# Altium PCB S7CAS-PLEIADES-CARTE-MERE_P01.PcbDoc (part 7 of 9)
Units mil, origin at the board's own origin, x right, y up, seen from the top; angles counter-clockwise.
Board outline 6153 x 3696 mil, 16 copper layers (Top, Ground Plane 1, Signal Layer 1, Ground Plane 2, Signal Layer 2, Ground Plane 3, Power Plane, Ground Plane 4, Ground Plane 5, Power Plane 2, Ground Plane 6, Signal Layer 3, Ground Plane 7, Signal Layer 4, Ground Plane 8, Bottom), stack 75.282 mil thick; 430 components, 328 nets, 2174 pads, 2158 vias.
Unrouted connection lines stored in the file: 202.
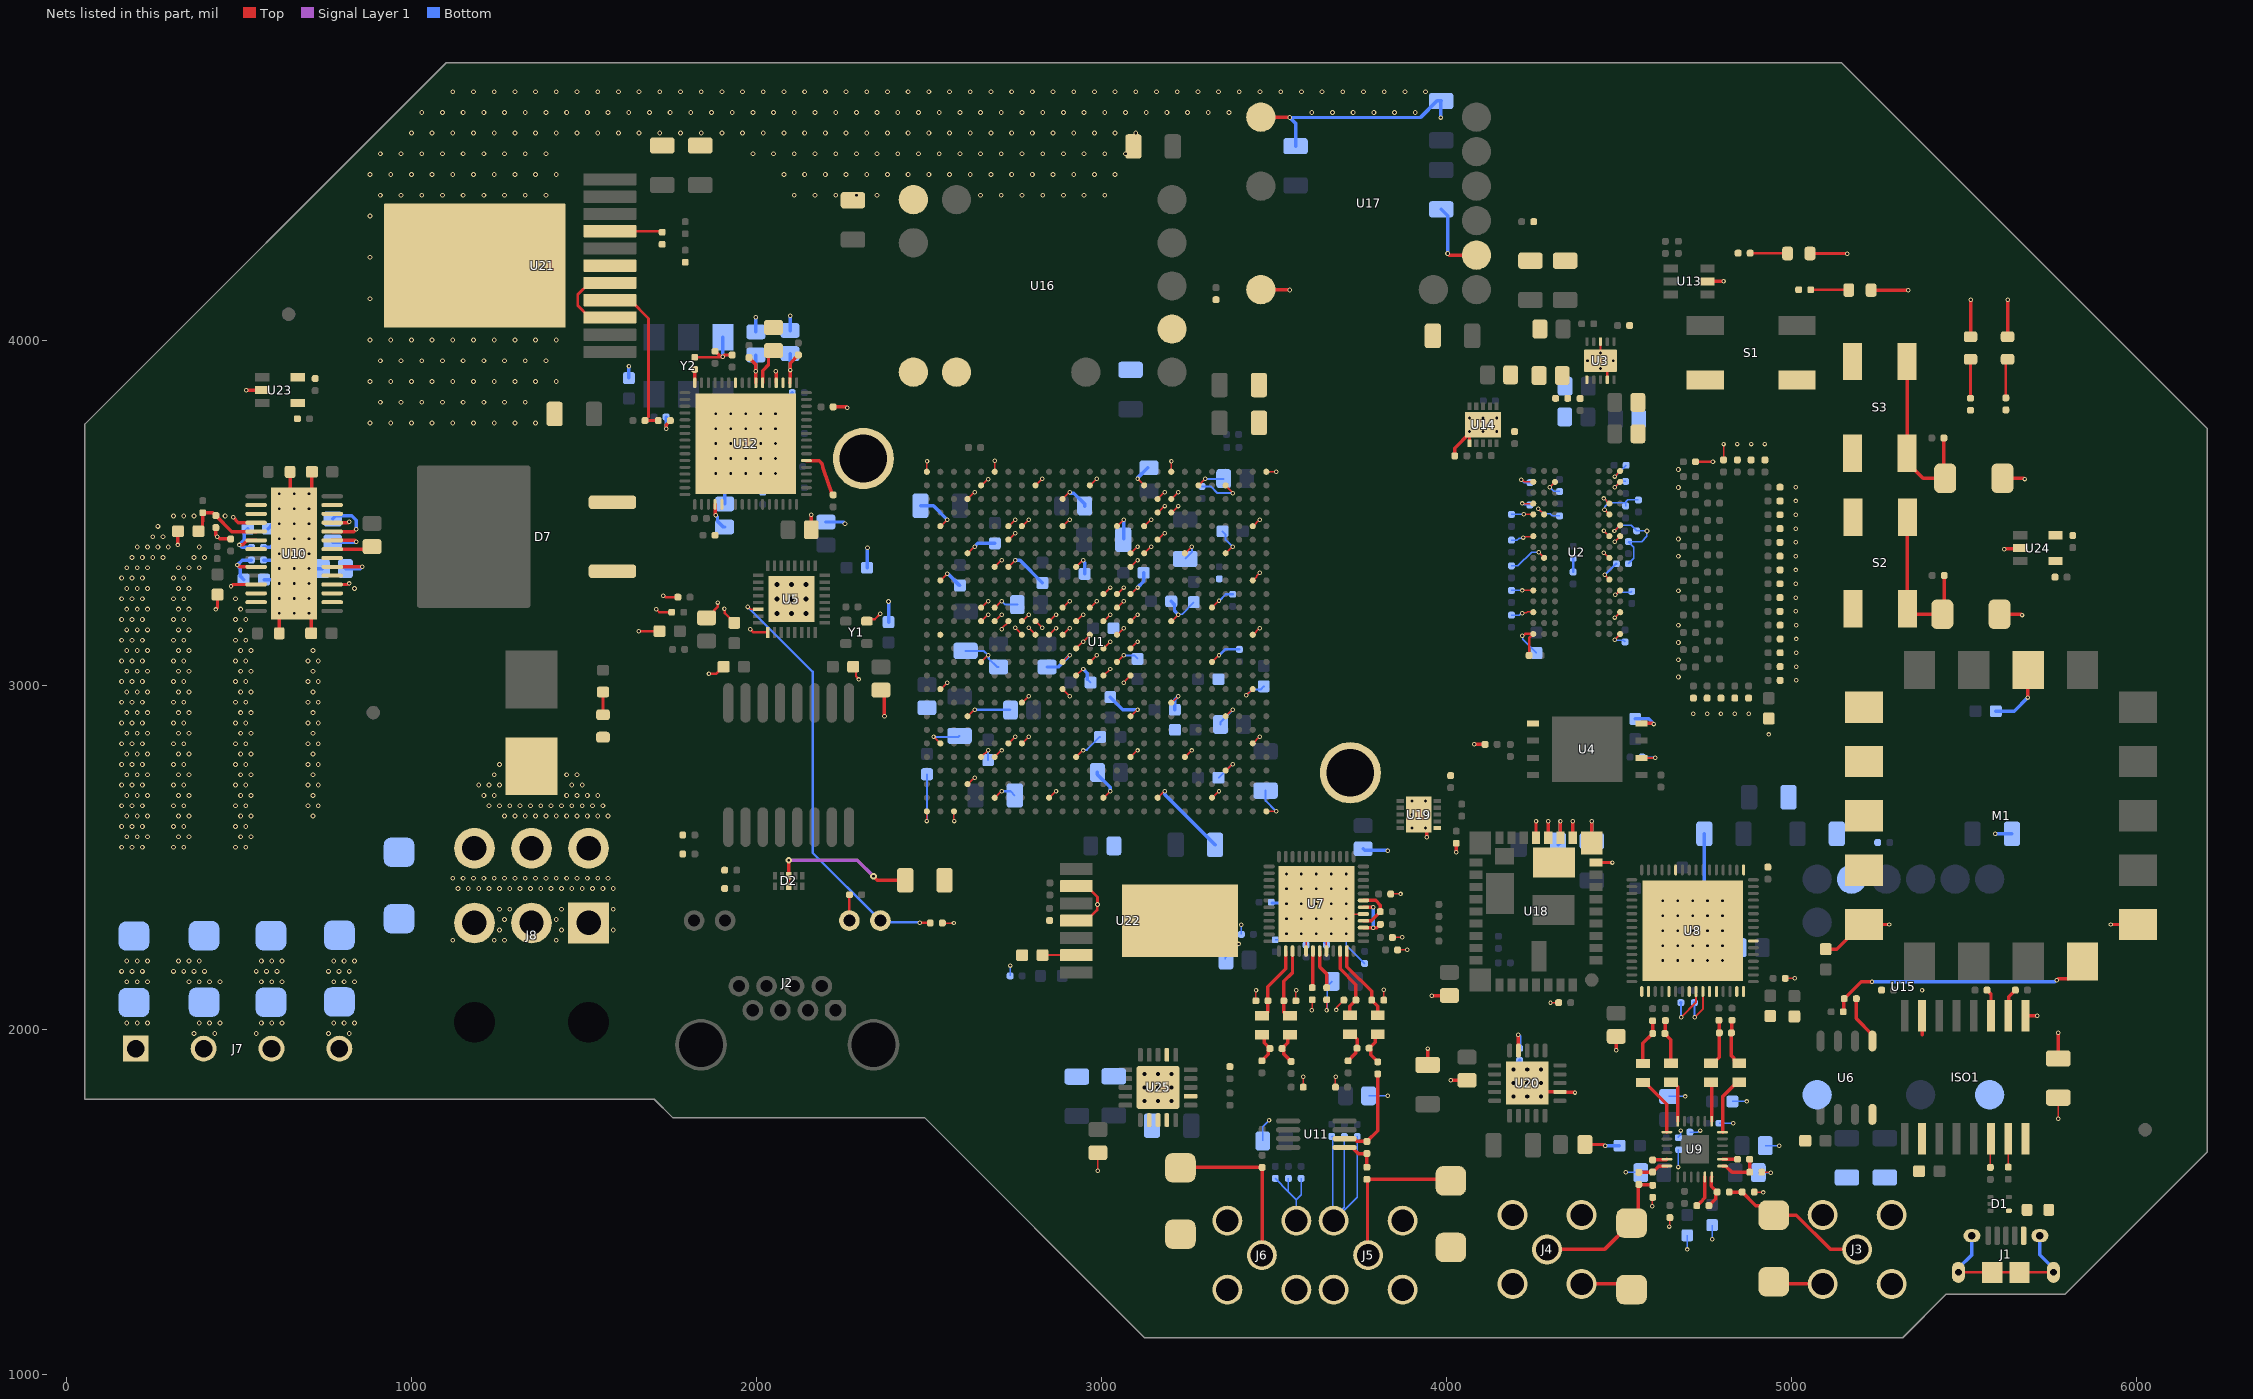
[diagram p19: the nets of this part, all layers, seen from the top]

## Via types
v1: diameter 14, hole 8, Top to Bottom, 1322 vias
v2: diameter 13, hole 7, Top to Bottom, 662 vias
v3: diameter 19.68, hole 7.87, Top to Bottom, 137 vias
v4: diameter 19.68, hole 11.81, Top to Bottom, 15 vias
v5: diameter 15.75, hole 7.87, Top to Bottom, 12 vias
v6: diameter 22, hole 12, Top to Bottom, 9 vias
v7: diameter 20, hole 12, Top to Bottom, 1 vias

## Nets (pads, with @x,y where several pads share a name; then routed paths per layer and width w, separated by ;. In a path a pad name is that pad's centre, name@x,y a point inside that pad or via, vN(x,y) a via of type N, cw(c..) or ccw(c..) an arc to the next point about the centre after c; other vN are vias at no path point) (continued)
GND: C1.1 C2.1 C3.1 C4.1 C5.1 C6.1 C7.1 C8.1 C9.1 C10.2 C11.1 C12.1 C13.1 C14.1 C16.1 C17.1 C18.1 C19.1 C20.1 C21.1 C22.1 C23.1 C24.1 C25.1 C26.1 C27.1 C28.1 C29.1 C30.1 C31.1 C32.1 C33.1 C34.1 C35.1 C36.1 C37.1 C38.1 C39.1 C40.1 C41.1 C42.1 C43.1 C44.1 C45.1 C46.1 C47.1 C49.1 C50.1 C55.1 C56.1 C57.1 C58.1 C59.1 C60.1 C61.1 C62.1 C63.1 C64.1 C65.1 C66.1 C67.1 C68.1 C69.1 C70.1 C71.1 C72.1 C73.1 C74.1 C75.1 C76.1 C78.1 C79.1 C80.1 C81.1 C82.1 C83.1 C84.1 C85.1 C86.1 C87.1 C88.1 C89.1 C90.1 C91.1 C92.1 C93.1 C96.1 C97.1 C98.1 C101.1 C102.1 C103.1 C104.1 C105.1 C106.1 C107.1 C108.1 C109.1 C110.1 C111.1 C112.1 C113.1 C114.1 C115.1 C116.1 C117.1 C118.1 C121.1 C122.1 C123.1 C124.1 C125.1 C126.1 C127.1 C128.1 C129.1 C130.1 C131.1 C132.1 C133.1 C134.1 C135.1 C136.1 C137.1 C138.1 C139.1 C140.1 C141.1 C142.1 C143.1 C144.1 C145.1 C146.1 C147.1 C148.1 C149.1 C150.1 C151.1 C152.1 C153.1 C154.1 C155.1 C158.1 C159.1 C160.1 C161.1 C162.1 C163.1 C164.1 C165.1 C166.1 C167.1 C168.1 C169.1 C170.1 C171.1 C172.1 C173.1 C174.1 C175.1 C176.1 C177.1 C178.1 C179.1 C180.1 C181.1 C182.1 C183.1 C188.1 C189.1 C190.1 C191.1 C192.1 C193.1 C194.1 C195.1 C196.1 C197.1 C198.1 C199.1 C200.1 C201.1 C202.1 C203.1 C204.1 C205.1 C206.1 C207.1 C208.1 C209.1 C210.1 C211.1 C212.1 C213.1 C214.1 C215.1 C216.1 C217.1 C218.1 C219.1 C220.1 C221.1 C222.1 C223.1 C224.1 C225.1 D3.K D4.K D5.K D6.K D7.1 D7.3 D8.A D9.A D10.K D11.2 D12.2 D13.2 D14.2 D15.2 D16.2 D17.2 D18.2 D19.2 ISO1.9 ISO1.15 J3.2 J3.3 J3.4 J3.5 J4.2 J4.3 J4.4 J4.5 J5.2 J5.3 J5.4 J5.5 J6.2 J6.3 J6.4 J6.5 J8.4 J8.5 J8.6 M1.1 M1.7 M1.14 R25.1 R28.2 R29.2 R32.2 R35.1 R41.1 R48.1 R56.1 R57.1 R63.1 R65.2 R66.1 R73.1 R77.1 R78.1 R79.1 R84.1 R85.1 R86.1 R89.1 R93.1 R94.1 R96.1 R97.1 R98.1 R99.1 R109.1 R110.1 R111.1 R113.1 R115.1 R116.1 R118.1 R119.1 R122.1 R123.1 R126.1 R128.1 R134.1 R136.1 S1.1 S1.2 S2.3 S2.4 S3.3 S3.4 U1.A1 U1.A26 U1.AA20 U1.AB2 U1.AB12 U1.AB16 U1.AB19 U1.AB20 U1.AB25 U1.AC8 U1.AD16 U1.AD23 U1.AE6 U1.AE10 U1.AE14 U1.AE18 U1.AE22 U1.AF1 U1.AF26 U1.B5 U1.B9 U1.B13 U1.B17 U1.B21 U1.D4 U1.E7 U1.E11 U1.E15 U1.E22 U1.F2 U1.F19 U1.F25 U1.H4 U1.H11 U1.H23 U1.J8 U1.J19 U1.K2 U1.K16 U1.K25 U1.L11 U1.L13 U1.L15 U1.M5 U1.M12 U1.M14 U1.M16 U1.M22 U1.N11 U1.N13 U1.N15 U1.P2 U1.P12 U1.P14 U1.P16 U1.P19 U1.P25 U1.R8 U1.R11 U1.R13 U1.R15 U1.T5 U1.T12 U1.T14 U1.T16 U1.T21 U1.U11 U1.V2 U1.V25 U1.W15 U1.W20 U1.W21 U1.Y4 U1.Y7 U1.Y11 U1.Y23 U2.A9 U2.B1 U2.B3 U2.B9 U2.D1 U2.D8 U2.E1 U2.E2 U2.E8 U2.F9 U2.G1 U2.G8 U2.G9 U2.J2 U2.J8 U2.M1 U2.M9 U2.P1 U2.P9 U2.T1 U2.T9 U3.4 U3.8 U3.11 U4.4 U5.1 U5.33 U5.34 U5.35 U5.36 U5.37 U5.38 U5.39 U5.40 U5.41 U5.42 U6.5 U7.5 U7.41 U7.44 U7.PAD U8.17 U8.18 U8.21 U8.24 U8.27 U8.28 U8.31 U8.32 U8.39 U8.49 U8.59 U8.PAD U10.7 U10.21 U10.PAD U12.36 U12.PAD U13.2 U14.6 U14.11 U15.1 U15.3 U15.6 U16.1 U16.3 U16.4 U16.7 U17.1 U17.3 U17.6 U18.10 U18.11 U18.12 U18.13 U18.14 U18.15 U18.39 U19.6 U19.11 U20.7 U20.21 U21.3 U21.5 U21.6 U21.12 U22.2 U22.4 U22.8 U23.2 U24.2 U25.2 U25.7 U25.17 U25.18 U25.19 U25.E1 U26.1 Y1.2 Y2.3 | length 16474.1
  Top w4: v2@2494.09,2606.13 U1.A26@2494.09,2633.97 ; U1.AF26@2494.09,3618.22 2494.39,3618.52 2494.39,3648.56 v2(2494.69,3648.85) ; v2(2513.52,2849.64) 2514.08,2849.64 2532.9,2830.82 U1.F25@2533.46,2830.82 U1.F25@2534.19,2830.82 ; U1.K25@2534.19,2988.3 v2@2553.01,3007.12 ; U1.V25@2534.19,3303.26 v2@2553.01,3322.08 ; U1.AB25@2534.19,3460.74 v2@2553.01,3479.56 ; R48.1@2539.07,2310.18 v2(2572.83,2310.18) ; U1.H23@2612.93,2909.56 v2@2631.75,2928.38 ; U1.Y23@2612.93,3382 v2@2631.75,3400.82 ; U1.AD23@2612.93,3539.48 v2@2631.75,3558.3 ; U1.E22@2652.3,2791.44 2652.3,2792.06 2671.73,2811.49 v2(2671.85,2811.49) ; U1.M22@2652.3,3067.04 v2@2671.12,3085.86 ; U1.AE22@2652.3,3578.85 2652.99,3578.85 2670.44,3596.3 v2(2671.85,3596.3) ; U1.B21@2691.67,2673.34 v2@2710.49,2692.16 ; U1.T21@2691.67,3224.52 v2@2710.49,3243.34 ; U1.W21@2691.67,3342.63 v2@2710.49,3361.45 ; U1.W20@2731.04,3342.63 v2@2749.86,3361.45 ; U1.AA20@2731.04,3421.37 v2@2749.86,3440.19 ; U1.AB20@2731.04,3460.74 v2@2749.86,3479.56 ; v2(2750.59,3166.3) 2750.59,3165.59 U1.P19@2770.4,3145.78 ; U1.F19@2770.41,2830.82 v2@2789.23,2849.64 ; U1.J19@2770.41,2948.93 v2@2789.23,2967.75 ; U1.AB19@2770.41,3460.74 v2@2789.23,3479.56 ; U1.AE18@2809.78,3578.85 v2@2828.6,3597.67 ; U1.B17@2849.15,2673.34 v2@2867.97,2692.16 ; U1.K16@2888.52,2988.3 2888.52,2987.43 2908.07,2967.89 v2(2908.07,2967.75) ; U1.M16@2888.52,3067.04 v2@2907.34,3085.86 ; U1.P16@2888.52,3145.78 v2@2907.34,3164.6 ; U1.T16@2888.52,3224.52 v2@2907.34,3243.34 ; U1.AB16@2888.52,3460.74 v2@2907.34,3479.56 ; U1.AD16@2888.52,3539.48 v2@2907.34,3558.3 ; U1.E15@2927.89,2791.45 v2@2946.71,2810.27 ; U1.L15@2927.89,3027.67 v2@2946.71,3046.49 ; U1.N15@2927.89,3106.41 v2@2946.71,3125.23 ; U1.R15@2927.89,3185.15 v2@2946.71,3203.97 ; U1.W15@2927.89,3342.63 v2@2946.71,3361.45 ; v2(2947.44,3125.23) 2947.44,3125.96 2966.54,3145.05 U1.P14@2966.54,3145.78 ; U1.M14@2967.26,3067.04 v2@2986.08,3085.86 ; U1.T14@2967.26,3224.52 v2@2986.08,3243.34 ; U1.AE14@2967.26,3578.85 v2@2986.08,3597.67 ; v2(2989.13,1591.78) 2989.13,1643.28 C36.1@2990.13,1644.28 ; U1.B13@3006.63,2673.34 v2@3025.45,2692.16 ; U1.L13@3006.63,3027.67 v2@3025.45,3046.49 ; U1.N13@3006.63,3106.41 v2@3025.45,3125.23 ; U1.R13@3006.63,3185.15 v2@3025.45,3203.97 ; U1.M12@3046,3067.04 v2@3064.82,3085.86 ; U1.P12@3046,3145.78 v2@3064.82,3164.6 ; U1.T12@3046,3224.52 v2@3064.82,3243.34 ; U1.AB12@3046,3460.74 v2@3064.82,3479.56 ; v2(3064.8,3007.1) 3064.8,3007.46 U1.L11@3085.01,3027.67 ; U1.E11@3085.37,2791.45 v2@3104.19,2810.27 ; U1.H11@3085.37,2909.56 v2@3104.19,2928.38 ; U1.N11@3085.37,3106.41 v2@3104.19,3125.23 ; U1.R11@3085.37,3185.15 v2@3104.19,3203.97 ; U1.U11@3085.37,3263.89 v2@3104.19,3282.71 ; U1.Y11@3085.37,3382 v2@3104.19,3400.82 ; v2(3104.92,3597.67) 3105.06,3597.67 3123.88,3578.85 U1.AE10@3124.02,3578.85 U1.AE10@3124.74,3578.85 ; U1.B9@3164.11,2673.34 v2@3182.93,2692.16 ; U1.J8@3203.48,2948.93 v2@3222.3,2967.75 ; U1.R8@3203.48,3185.15 v2@3222.3,3203.97 ; U1.AC8@3203.48,3500.11 v2@3222.3,3518.93 ; U1.E7@3242.85,2791.45 v2@3261.67,2810.27 ; U1.Y7@3242.85,3382 v2@3261.67,3400.82 ; U1.AE6@3282.22,3578.85 v2@3301.04,3597.67 ; U1.B5@3321.59,2673.34 v2@3340.41,2692.16 ; U1.M5@3321.59,3067.04 v2@3340.41,3085.86 ; U1.T5@3321.59,3224.52 3321.59,3224.89 3340.79,3244.09 v2(3341.14,3244.09) ; U1.D4@3360.96,2752.08 v2@3379.78,2770.9 ; U1.H4@3360.96,2909.56 v2@3379.78,2928.38 ; U1.Y4@3360.96,3382 v2@3379.78,3400.82 ; v2(3419.88,2970.28) 3420.42,2970.28 3438.44,2988.3 U1.K2@3438.98,2988.3 U1.K2@3439.7,2988.3 ; U1.F2@3439.7,2830.82 v2@3458.52,2849.64 ; U1.P2@3439.7,3145.78 v2@3458.52,3164.6 ; U1.V2@3439.7,3303.26 3450.26,3313.82 3450.26,3316.34 v2(3459.25,3325.33) ; U1.AB2@3439.7,3460.74 v2@3458.52,3479.56 ; R85.1@3448.01,2084.75 v2@3448.01,2114.46 ; U1.A1@3478.35,2633.97 v2(3506.5,2633.97) ; U1.AF1@3478.35,3618.22 v2(3506.5,3618.22) ; R84.1@3564.01,2084.75 v2@3564.01,2114.46 ; R86.1@3585.32,1834.25 v2@3585.32,1863.96 ; U7.41@3593.6,2228.97 3593.6,2336.25 v3(3623.13,2365.78) ; v2(3610.38,2057.12) 3610.85,2057.58 3610.85,2087.29 C93.1@3611.31,2087.75 ; U7.44@3652.65,2228.97 3652.65,2336.25 U7.5@3759.94,2336.25 ; v2@3653.31,2058.05 R65.2@3653.31,2087.75 ; R79.1@3678.81,1834.25 v2@3678.81,1863.96 ; v2(3680.6,2058.05) 3682.32,2059.77 3682.32,2066.14 R77.1@3702.93,2086.75 ; R78.1@3818.81,2086.75 v2@3818.81,2116.46 ; C55.1@3838.81,2394.25 v2(3867.31,2394.31) ; C200.1@3843.81,2268.25 v2(3872.31,2268.31) ; C201.1@3858.81,2232.25 v2(3887.31,2232.31) ; v2(4217.32,3595.26) 4219.75,3595.26 4225.84,3589.17 4231.73,3589.17 4231.82,3589.09 U2.B1@4252.2,3589.09 ; v2(4220.08,3208.5) 4221.37,3209.79 4232.58,3209.79 4234.58,3211.79 4251.55,3211.79 U2.P1@4252.2,3211.13 ; v2(4220.08,3274.13) U2.M1@4252.2,3274.13 ; v2(4220.08,3526.36) 4220.21,3526.23 4252.07,3526.23 U2.D1@4252.2,3526.09 ; v2(4223.47,3427.66) 4225.2,3429.38 4249.98,3429.38 U2.G1@4252.2,3431.61 ; v2(4224.46,3495.12) 4224.72,3494.86 4251.95,3494.86 U2.E1@4252.2,3494.6 ; v2(4267.06,3511.35) 4267.06,3511.29 4283.7,3494.66 U2.E2@4283.7,3494.6 ; v2(4267.7,3384.94) 4267.7,3384.77 4283.7,3368.78 U2.J2@4283.7,3368.61 ; v2(4299.45,3572.94) 4299.45,3573.14 4315.2,3588.89 U2.B3@4315.2,3589.09 ; v2(4302.13,2078.78) 4302.38,2079.03 4325.38,2079.03 R122.1@4325.63,2079.28 ; U3.11@4446.98,3963.22 U3.11@4448.98,3961.22 ; v2(4456.04,3384.05) 4456.64,3384.05 4472.08,3368.61 U2.J8@4472.68,3368.61 ; v2(4456.6,3540.88) 4457.24,3540.88 4472.03,3526.09 U2.D8@4472.68,3526.09 ; v2(4457.08,3447.75) 4457.08,3447.48 4472.68,3431.88 U2.G8@4472.68,3431.61 ; v1(4458.51,3507.92) 4458.94,3507.92 4472.25,3494.6 U2.E8@4472.68,3494.6 ; U3.11@4464.98,3918.22 U3.11@4466.66,3916.54 ; v2(4487.58,3446.54) U2.F9@4504.17,3463.1 ; v2(4487.91,3131.41) 4487.91,3131.65 4504.17,3147.91 U2.T9@4504.17,3148.14 ; v2@4488.03,3572.94 U2.B9@4504.17,3589.09 ; v2@4488.03,3604.44 U2.A9@4504.17,3620.58 ; v2(4488.23,3415.29) 4488.23,3415.48 4504.17,3431.42 U2.G9@4504.17,3431.61 ; v2(4488.62,3195.76) 4488.71,3195.76 4504.09,3211.13 U2.P9@4504.17,3211.13 ; v2(4490.16,3261.85) 4491.03,3261.85 4503.3,3274.13 U2.M9@4504.17,3274.13 ; D19.2@4520.67,1263.78 D19.2@4537.13,1247.32 ; v2(4597.13,1488.78) 4597.75,1489.4 4597.75,1514.15 R73.1@4598.38,1514.78 ; v2@4647.5,1430.9 R89.1@4647.5,1455.65 ; C174.1@4803.65,3652.72 v2(4803.65,3698.72) ; R63.1@4893.25,1529.65 v2@4918,1529.65 ; R66.1@4915.25,1587.15 v2@4940,1587.15 ; D18.2@4949.13,1270.32 D18.2@4955.67,1263.78 ; C165.1@4982.63,2149.78 v2(5009.63,2149.78)
  Top w7: v2(1659.57,3156.18) C78.1@1719.07,3156.18 ; v2(1709.57,3220.18) 1718.6,3211.14 C73.1@1754.36,3211.14 ; v2(1730.07,3259.02) 1732.51,3259.02 1736.77,3254.76 R57.1@1772.51,3254.76 ; C84.1@1821.37,3950.19 v2@1899.84,3950.19 ; C101.1@1855.57,3194.68 1858.35,3194.68 1877.4,3213.72 1877.4,3216.5 1887.57,3226.68 1887.57,3238.18 v2(1888.57,3239.18) ; v2(1862.57,3032.18) 1883.13,3032.18 1904.13,3053.18 C70.1@1905.07,3053.18 ; v2(1907.57,3221.18) 1908.16,3220.59 1908.16,3208.68 1936.06,3180.78 C106.1@1936.06,3180.28 ; v2(1982.57,3162.18) 1992.03,3152.72 U5.1@2032.87,3152.72 ; C69.1@2280.58,3053.18 2288.7,3045.07 2288.7,3025.68 2296.57,3017.8 v2(2296.57,3016.18) ; Y1.2@2320.49,3185.2 2326,3190.71 2343.23,3190.71 v2(2359.57,3207.05) ; v2(4220.57,3142.49) 4223.01,3142.49 4228.79,3148.27 4252.07,3148.27 U2.T1@4252.2,3148.14 4239.98,3135.91 R25.1@4239.98,3085.86 ; U3.11@4446.98,3963.22 U3.8@4446.98,3995.34 ; U3.4@4466.66,3885.1 U3.11@4466.66,3916.54
  Top w7.46: R29.2@4720.26,3647.22 R29.2@4722.48,3647.22 v1(4772.78,3647.22)
  Top w8: U21.3@1575.28,4065.74 1516.22,4065.74 1482.13,4099.83 1482.13,4131.64 1516.22,4165.74 U21.5@1575.28,4165.74 ; U22.4@2957.54,2316.94 2987.98,2347.38 v1@2987.98,2362.94 ; U22.2@2957.54,2416.94 2989.13,2385.35 v1(2989.13,2364.09)
  Top w10: v2(323,3406) 323.25,3406.25 323.25,3445.75 C2.1@323.5,3446 ; v2(432.5,3219.09) 432.5,3219.91 437.81,3225.22 C1.1@437.81,3261.93 ; R96.1@433,3456.5 433,3434.81 437,3430.81 v2(437,3430) 437.81,3430 444.31,3423.5 R93.1@476,3423.5 ; v2(521,3854) 521.81,3854 522.81,3855 U23.2@567.82,3855 ; R97.1@616.69,3150 v3(616.69,3207.77) ; v3(616.69,3554.23) 630.52,3554.23 648.19,3571.9 R94.1@648.19,3618 ; v3(703.31,3207.77) 709.5,3201.58 C72.1@709.5,3150 ; v3(703.31,3424.31) 711.5,3432.5 C76.1@711.5,3618 ; v2(1738.15,3742.69) 1738.72,3743.27 1738.72,3754.28 1750.63,3766.18 R56.1@1750.63,3766.72 ; C221.1@1880.15,3967.69 1880.69,3967.69 1895.62,3952.77 1902.08,3952.77 v2(1902.65,3952.19) 1903.46,3952.19 1907.96,3956.69 R111.1@1929.65,3956.69 ; v2(2055.63,3909.19) 2055.63,3908.38 2057.6,3906.41 U12.36@2057.6,3876.19 ; v2(2158.65,3494.19) 2158.9,3493.94 2158.9,3450.44 C180.1@2159.15,3450.19 ; R109.1@2222.65,3806.19 2260.84,3806.19 2262.84,3804.19 v2(2263.65,3804.19) ; v1(2371.13,2909.56) C220.1@2371.13,2985.28 ; v1@2383.13,3242.39 v1(2383.28,3242.54) ; U17.3@3462.46,4146.22 v1@3544.98,4146.22 ; U17.1@3462.46,4646.22 v1@3544.98,4646.22 ; v2(3943.58,2558.91) U19.11@3943.58,2585.41 ; C112.1@3945.87,1898.95 v2(3945.87,1946.25) ; v2(3958.13,2098.78) 4007.63,2098.78 C105.1@4008.89,2100.04 ; v1(4003.98,4251.22) 4008.98,4246.22 U17.6@4087.46,4246.22 ; v2(4012.71,1854.28) C61.1@4060.13,1854.28 ; R115.1@4024.48,3664.22 4024.48,3686.85 4067.24,3729.61 v5(4067.24,3734.72) ; v2(4028.86,2514.91) R118.1@4028.86,2541.41 ; U14.6@4067.24,3700.28 U14.11@4067.24,3728.48 ; v2(4080.71,2828) R35.1@4112.5,2828 ; v4(4234.78,1846.01) 4260.37,1820.42 U20.7@4329.27,1820.42 4330.09,1819.6 4372.31,1819.6 v2(4373.13,1818.78) ; U18.15@4260.13,2557.36 v2(4260.13,2604.78) ; U18.14@4295.56,2557.36 v2(4295.56,2604.78) ; U18.13@4330.99,2557.36 v2(4330.99,2604.78) ; U18.12@4366.43,2557.36 v2(4366.43,2604.78) ; J4.5@4392.12,1263.78 D19.2@4520.67,1263.78 ; R126.1@4401.93,1668.07 4454.87,1668.07 4458.16,1664.78 v2(4460.6,1664.78) ; U18.11@4421.54,2542.6 v2(4421.54,2604.78) ; U18.10@4434.34,2485.51 v2(4481.76,2485.51) ; v2(4492.63,1941.87) C166.1@4492.63,1981.5 ; U4.4@4565.72,2889.01 v2@4599.18,2889.01 ; U13.2@4757.15,4170 v2(4803.65,4170) ; D18.2@4955.67,1263.78 J3.4@5091.12,1263.78 ; D3.K@5054.48,4251.03 5160.19,4251.03 5161.19,4250.03 v2(5162,4250.03) ; C66.1@5100.13,2234.28 5132.13,2234.28 5160.37,2262.52 5160.37,2265.54 5200.65,2305.82 M1.14@5210.49,2305.82 v2(5284.7,2305.82) ; R41.1@5188.63,2090.78 5188.63,2033.28 5235.13,1986.78 U6.5@5235.13,1968.08 ; D4.K@5231.48,4145 5337.19,4145 5338.19,4144 v2(5339,4144) ; 5379.13,1986.78 ISO1.15@5379.13,2041.03 ; D5.K@5519.78,4009.48 5519.78,4115.19 5520.78,4116.19 v2(5520.78,4117) ; D8.A@5604.07,3205 5666.14,3205 5668.19,3202.95 v2(5669,3202.95) ; D9.A@5612.46,3599.25 v2@5674.53,3599.25 ; v2@5618.81,3395 U24.2@5663.82,3395 ; D6.K@5627,4009.48 5627,4115.19 5628,4116.19 v2(5628,4117) ; ISO1.9@5679.13,2041.03 v2(5712.86,2041.03) ; v2(5686.13,2963.78) 5686.13,3042.28 M1.7@5686.87,3043.02 ; C47.1@5774.13,1917.78 v2(5774.13,1991.99) ; v2(5926.65,2305.82) M1.1@6005.76,2305.82
  Bottom w4: C150.1@2494.39,2741.1 C150.1@2494.69,2741.4 ; v2(2553.74,3322.08) v2@2555.43,3322.08 ; C65.1@2588.94,3288.57 C65.1@2590.13,3288.57 ; R128.1@2735.51,2156.94 2735.76,2157.19 2735.76,2186.69 v2(2736.01,2186.94) ; C143.1@2735.63,2928.38 C143.1@2736.78,2927.23 ; C134.1@2736.75,2692.16 C134.1@2749.13,2679.78 ; C139.1@2959.47,3016.67 C139.1@2969.02,3007.12 ; C121.1@3063.5,3421.37 C121.1@3065.55,3423.43 ; v2(3065.55,3085.86) v2@3065.71,3085.7 ; C151.1@3095.21,3085.7 C151.1@3104.92,3075.99 ; v2(3104.92,3597.67) v2@3104.92,3600.1 ; C122.1@3134.62,3629.8 C122.1@3138.13,3629.8 ; v2(3223.03,3203.97) 3224.75,3205.69 3234.04,3205.69 3268.13,3239.78 C129.1@3268.13,3240.28 ; C126.1@3243.13,3365.78 C126.1@3262.4,3385.06 ; C149.1@3339.48,2731.53 C149.1@3340.56,2731.53 ; C127.1@3353.81,3597.67 C127.1@3354.63,3598.49 ; C118.1@3359.31,2204.97 3359.31,2208.73 3398.24,2247.66 v2(3398.24,2249.41) ; v2@3379.93,2770.9 v2(3380.51,2770.9) ; C59.1@3405.8,2277.24 v2(3405.79,2305.2) ; C191.1@3467.81,1678.25 3467.81,1719.47 v2(3486.13,1737.78) ; C56.1@3492.5,2370.47 C56.1@3494.84,2368.13 ; C188.1@3504.31,1569.75 3542.31,1531.75 ; C198.1@3504.31,2261.75 3519.1,2261.75 v3(3536.51,2279.17) ; v3@3534.17,2368.13 v3(3536.51,2365.78) ; C189.1@3542.31,1569.75 3542.31,1531.75 ; J6.3@3565.51,1447.25 3565.51,1508.56 ; C190.1@3579.31,1569.75 3579.31,1522.36 3565.51,1508.56 ; v3(3579.82,2279.17) 3593.6,2265.39 C197.1@3593.6,2246.47 ; v3(3623.13,2279.17) 3623.13,2277.58 3652.65,2248.05 C196.1@3652.65,2246.47 ; v2(3652.85,2057.58) 3654.57,2059.3 3654.57,2126.1 C199.1@3669.43,2140.97 ; C192.1@3667.93,1691.64 3670.62,1688.95 3670.62,1449.95 J5.2@3673.31,1447.26 ; C193.1@3704.51,1691.3 3704.51,1485.79 3673.31,1454.59 J5.2@3673.31,1447.26 ; v3(3709.74,2279.17) 3709.74,2246.33 C202.1@3763.31,2192.75 ; C194.1@3741.91,1691.3 3741.91,1515.86 J5.2@3673.31,1447.26 ; C195.1@3774.81,1809.25 v2(3830.66,1809.25) ; C158.1@4188.98,3202.65 4211.79,3202.65 4217.64,3208.5 v2(4220.08,3208.5) ; C159.1@4188.98,3274.37 4189.1,3274.25 4219.96,3274.25 v2(4220.08,3274.13) ; C160.1@4188.98,3345.56 4207.75,3345.56 4247.13,3384.94 v2(4267.7,3384.94) ; C161.1@4188.98,3419.94 4204.99,3419.94 4211,3425.94 4221.75,3425.94 v2(4223.47,3427.66) ; C167.1@4188.98,3494.76 4189.15,3494.94 4224.28,3494.94 v2(4224.46,3495.12) ; v2(4217.32,3595.26) 4217.92,3595.26 4226.46,3586.72 C170.1@4242.98,3586.72 ; v2(4220.08,3526.36) 4222.29,3526.36 4226.58,3522.07 C164.1@4242.41,3522.07 ; v2(4220.57,3142.49) 4222.29,3140.77 4222.29,3132.38 4261.33,3093.34 C153.1@4261.33,3092.84 ; v2(4267.06,3511.35) 4281.65,3496.77 4301.13,3496.77 4307.48,3490.42 C162.1@4328.39,3490.42 ; v2(4299.45,3572.94) 4311.31,3561.08 C163.1@4328.39,3561.08 ; v2(4456.6,3540.88) 4469.56,3527.92 ; v1(4458.51,3507.92) 4459.39,3508.8 4459.39,3517.42 4469.56,3527.58 ; 4469.56,3527.75 C60.1@4519.98,3527.75 ; v2(4487.58,3446.54) 4504,3462.96 4535.89,3462.96 C75.1@4551.89,3446.96 4552.08,3446.77 4581.42,3446.77 v1(4581.61,3446.59) 4581.61,3431.03 4566.48,3415.91 C74.1@4527.98,3415.91 4543.98,3399.91 4543.98,3367.59 R28.2@4527.98,3351.59 ; v2(4487.91,3131.41) 4489.64,3129.69 4513.71,3129.69 C155.1@4518.41,3124.99 ; v2(4487.91,3572.94) 4505.41,3590.44 C57.1@4519.98,3590.44 ; v2(4487.91,3604.44) 4488.32,3604.44 4521.1,3637.22 C152.1@4521.5,3637.22 ; v2(4490.16,3261.85) 4492.59,3261.85 4499.09,3268.35 4534.39,3268.35 C154.1@4537.72,3271.68 ; C60.1@4519.98,3519.02 C60.1@4519.98,3527.75 ; v2(4520.67,1587.96) 4562.19,1587.96 C208.1@4563.63,1586.53 ; C58.1@4557.03,3536.52 4525.75,3536.52 4519.98,3530.74 C60.1@4519.98,3527.75 ; C211.1@4644.63,1807.28 v2(4692.27,1807.28) ; v2(4672.13,1602.78) 4672.88,1603.53 4672.88,1652.03 C207.1@4673.63,1652.78 ; C216.1@4672.63,1687.78 4672.63,1689.94 4679.63,1696.94 v2(4679.63,1708.62) ; v2(4698.47,1363.78) C218.1@4698.47,1404.78 ; C210.1@4706.27,1703.78 4729.28,1703.78 4734.12,1708.62 v2(4736.56,1708.62) ; v2(4770.63,1393.28) C215.1@4770.63,1434.28 ; C213.1@4790.63,1729.78 v2(4832.15,1729.78) ; C212.1@4829.63,1792.78 v2(4871.15,1792.78) ; C214.1@4904.65,1586.53 v2(4940.63,1586.53) ; C217.1@4924.63,1664.78 v2(4965.63,1664.78) ; 3542.31,1531.75 3565.51,1508.56
  Bottom w6: v2(2494.39,2605.84) C150.1@2494.39,2741.1 ; v2(2513.52,2849.64) 2586.01,2849.64 C142.1@2588.94,2852.56 ; C141.1@2606.27,3099.18 2658.53,3099.18 v2(2671.85,3085.86) 2673.57,3084.14 2673.57,3076.63 2697.84,3052.36 C144.1@2702.13,3052.36 ; v2(2632.48,2928.38) C143.1@2735.63,2928.38 ; C148.1@2671.85,2782.49 v2(2671.85,2811.49) ; v2(2711.22,2692.16) C134.1@2736.75,2692.16 ; v2(2711.22,3243.34) 2721.57,3232.99 C145.1@2756.46,3232.99 ; v2(2947.44,2810.27) 2949.16,2811.99 2957.96,2811.99 2995.61,2849.64 C147.1@2996.11,2849.64 ; v2@3065.71,3085.7 C151.1@3095.21,3085.7 ; C126.1@3262.4,3385.06 v2(3262.4,3400.82) ; v2(3301.77,3597.67) C127.1@3353.81,3597.67 ; C149.1@3340.56,2731.53 v2@3379.93,2770.9 ; C131.1@3345.63,2885.78 3345.63,2892.64 3380.51,2927.52 v2(3380.51,2928.38) ; C128.1@3351.01,3445.65 3360.56,3436.1 3360.56,3420.77 v2(3380.51,3400.82) ; v2(3419.88,2970.28) 3436.38,2986.78 3461.43,2986.78 C132.1@3471.02,2996.38 ; C130.1@3476.13,2693.78 3476.13,2664.34 v2(3506.5,2633.97)
  Bottom w7: v2(3341.14,3085.86) 3358.64,3103.36 C13.1@3400.2,3103.36 ; v2(3341.14,3244.09) 3341.89,3244.09 3360.89,3263.09 C12.1@3380.51,3263.09
  Bottom w10: R99.1@571.19,3362.12 597.81,3362.12 v3(616.69,3381) ; R98.1@571.5,3399 591.39,3399 v3(616.69,3424.31) ; C80.1@572.67,3305.76 605.17,3305.76 616.55,3294.39 v3(616.69,3294.39) ; C79.1@584.5,3453 595.91,3464.41 610.87,3464.41 614.07,3467.61 v3(616.69,3467.61) ; v3(703.31,3337.69) C10.2@742,3337.69 ; C178.1@1630.65,3890.69 v2(1630.65,3924.19) ; v2(1738.15,3742.69) C177.1@1738.15,3776.19 ; v3(1882.4,3613.4) 1907.96,3587.83 C116.1@1907.96,3525.19 ; v2(1902.65,3952.19) Y2.3@1902.65,4007.87 ; C113.1@1998.54,4023.69 v2(1998.54,4066.19) ; v3(2012.32,3613.4) 2012.32,3610.78 2018.23,3604.87 C222.1@2018.23,3558.83 ; v3(2055.63,3743.32) 2058.25,3743.32 2072.03,3729.54 C224.1@2104.15,3729.54 ; v3(2055.63,3786.62) 2057.48,3788.48 2057.48,3800.98 C223.1@2104.15,3847.65 ; C114.1@2097.65,4027.69 v2(2097.65,4070.19) ; C225.1@2099.15,3633.08 2075.31,3633.08 v3(2055.63,3613.4) 2075.69,3593.34 2082.87,3593.34 C179.1@2104.15,3572.06 ; C86.1@2201.57,3472.68 2251.22,3472.68 2256.14,3467.76 v1(2257.22,3467.76) ; C71.1@2320.79,3340.11 2320.79,3396.45 v1(2322.13,3397.78) ; C219.1@2383.13,3182.68 v1@2383.13,3242.39 ; C62.1@2476.13,3519.78 2513.52,3519.78 v2(2553.74,3479.56) ; v2@2555.43,3322.08 C65.1@2588.94,3288.57 ; v2(2632.48,3400.82) 2642.35,3410.69 C64.1@2691.54,3410.69 ; v2(2750.59,3361.45) 2764.21,3361.45 2829.33,3296.33 C123.1@2829.33,3295.83 ; C136.1@2842.68,3052.36 2874.57,3052.36 v2(2908.07,3085.86) ; v2(2908.07,3558.3) 2909.79,3556.58 2919.98,3556.58 2951.63,3524.93 C63.1@2951.63,3518.93 ; v2(2947.44,3046.49) 2959.47,3034.46 C139.1@2959.47,3016.67 ; v2(2947.44,3361.45) 2947.44,3359.01 2951.63,3354.83 C138.1@2951.63,3322.08 ; C33.1@2988.63,2746.78 2988.63,2740.78 3025.61,2703.8 3025.61,2692.73 v2(3026.18,2692.16) ; C34.1@3026.18,2964.78 3026.18,2964.28 3062.08,2928.38 v2(3104.92,2928.38) ; C121.1@3065.55,3423.43 v2(3065.55,3479.56) ; v2(3104.92,3282.71) 3122.63,3300.41 C124.1@3122.63,3325.33 ; v2@3104.92,3600.1 C122.1@3134.62,3629.8 ; v2(3183.66,2692.16) 3183.66,2682.74 C25.1@3329.63,2536.78 ; C137.1@3202.63,3242.54 3212.18,3232.99 3212.18,3214.82 v2(3223.03,3203.97) ; C35.1@3213.16,2928.38 3213.16,2957.88 v2(3223.03,2967.75) ; C56.1@3494.84,2368.13 v3@3534.17,2368.13 ; C98.1@3562.98,4562.22 3562.98,4628.22 v1(3545.98,4645.22) 3925.2,4645.22 3973.2,4693.22 C97.1@3985.2,4693.22 3984.13,4692.15 v2(3984.13,4645.22) ; C41.1@3758.72,2525.41 3763.56,2520.57 3830.08,2520.57 v2(3830.66,2520) ; C96.1@3985.2,4379.22 3985.7,4379.22 4003.98,4360.95 v1(4003.98,4251.22) ; v4(4195.41,1885.38) 4197.27,1887.23 4197.27,1895.95 4212.7,1911.38 C111.1@4212.7,1911.92 ; C104.1@4324.13,2536.78 4330.99,2543.65 v2(4330.99,2604.78) ; v2(4421.54,2604.78) 4421.54,2548.36 C103.1@4422.13,2547.78 ; v2(4460.6,1664.78) C209.1@4502.13,1664.78 ; C125.1@4547.52,2902 4586.59,2902 4601.59,2887 v2(4602,2887) ; C206.1@4606.63,2410.78 4616.18,2401.23 4616.18,2385.73 v3(4627.51,2374.39) ; v3(4670.82,2374.39) 4684.13,2387.7 C205.1@4684.13,2411.78 ; C8.1@4747.98,2568.78 4747.98,2427.15 v3(4800.74,2374.39) ; v3(4800.74,2244.47) 4804.98,2244.47 4810.89,2238.57 C204.1@4849.13,2238.57 ; v2(5591.13,2568.78) C90.1@5639.6,2568.78 ; C67.1@5593.13,2924.22 5646.57,2924.22 v2(5686.13,2963.78)
  other v1: 4672.73,3023 4672.73,3073.27 4672.73,3123.55 4672.73,3173.24 4672.73,3273.27 4672.73,3373.27 4672.73,3423.27 4672.73,3572.95 4672.73,3625.21 880,3760 940,3760 1000,3760 1060,3760 1120,3760 1180,3760 1240,3760 1300,3760 1360,3760 910,3820 970,3820 1030,3820 1090,3820 1150,3820 1210,3820 1270,3820 1330,3820 880,3880 940,3880 1000,3880 1060,3880 1120,3880 1180,3880 1240,3880 1300,3880 1360,3880 1420,3880 910,3940 970,3940 1030,3940 1090,3940 1150,3940 1210,3940 1270,3940 1330,3940 1390,3940 880,4000 940,4000 1000,4000 1060,4000 1120,4000 1180,4000 1240,4000 1300,4000 1360,4000 1420,4000 880,4120 3545.98,4145.22 880,4240 880,4360 910,4420 970,4420 1030,4420 1090,4420 1150,4420 1210,4420 1270,4420 1330,4420 1390,4420 2110,4420 2170,4420 2230,4420 2290,4420 2350,4420 2650,4420 2710,4420 2770,4420 2830,4420 2890,4420 2950,4420 3010,4420 880,4480 940,4480 1000,4480 1060,4480 1120,4480 1180,4480 1240,4480 1300,4480 1360,4480 1420,4480 2080,4480 2140,4480 2200,4480 2260,4480 2320,4480 2380,4480 2440,4480 2500,4480 2560,4480 2620,4480 2680,4480 2740,4480 2800,4480 2860,4480 2920,4480 2980,4480 3040,4480 910,4540 970,4540 1030,4540 1090,4540 1150,4540 1210,4540 1270,4540 1330,4540 1390,4540 1990,4540 2050,4540 2110,4540 2170,4540 2230,4540 2290,4540 2350,4540 2410,4540 2470,4540 2530,4540 2590,4540 2650,4540 2710,4540 2770,4540 2830,4540 2890,4540 2950,4540 3010,4540 3070,4540 1000,4600 1060,4600 1120,4600 1180,4600 1240,4600 1300,4600 1360,4600 1420,4600 1480,4600 1540,4600 1600,4600 1660,4600 1720,4600 1780,4600 1840,4600 1900,4600 1960,4600 2020,4600 2080,4600 2140,4600 2200,4600 2260,4600 2320,4600 2380,4600 2440,4600 2500,4600 2560,4600 2620,4600 2680,4600 2740,4600 2800,4600 2860,4600 2920,4600 2980,4600 3040,4600 3100,4600 1030,4660 1090,4660 1150,4660 1210,4660 1270,4660 1330,4660 1390,4660 1450,4660 1510,4660 1570,4660 1630,4660 1690,4660 1750,4660 1810,4660 1870,4660 1930,4660 1990,4660 2050,4660 2110,4660 2170,4660 2230,4660 2290,4660 2350,4660 2410,4660 2470,4660 2530,4660 2590,4660 2650,4660 2710,4660 2770,4660 2830,4660 2890,4660 2950,4660 3010,4660 3070,4660 3130,4660 3190,4660 3250,4660 3310,4660 3370,4660 3610,4660 3670,4660 3730,4660 3790,4660 3850,4660 3910,4660 1120,4720 1180,4720 1240,4720 1300,4720 1360,4720 1420,4720 1480,4720 1540,4720 1600,4720 1660,4720 1720,4720 1780,4720 1840,4720 1900,4720 1960,4720 2020,4720 2080,4720 2140,4720 2200,4720 2260,4720 2320,4720 2380,4720 2440,4720 2500,4720 2560,4720 2620,4720 2680,4720 2740,4720 2800,4720 2860,4720 2920,4720 2980,4720 3040,4720 3100,4720 3160,4720 3220,4720 3280,4720 3340,4720 3400,4720 3460,4720 3520,4720 3580,4720 3640,4720 3700,4720 3760,4720 3820,4720 3880,4720 3940,4720
  other v2: 4646.88,1430.28 4918.63,1529.03 3585.78,1864.42 3679.28,1864.42 3448.48,2114.92 3564.48,2114.92 5379.13,2115.24 3819.28,2116.92 2868.7,2692.16 3341.14,2692.16 3104.92,2810.27 3262.4,2810.27 2789.96,2849.64 3459.25,2849.64 4934.98,2856.72 4716.31,2916.22 4756.31,2916.22 4796.31,2916.22 4836.31,2916.22 4876.31,2916.22 2789.96,2967.75 2553.74,3007.12 5013.98,3013.55 3026.18,3046.49 5013.98,3053.55 2986.81,3085.86 5013.98,3093.55 3026.18,3125.23 3104.92,3125.23 5013.98,3133.55 2908.07,3164.6 3065.55,3164.6 3459.25,3164.6 5013.98,3173.55 2947.44,3203.97 3026.18,3203.97 3104.92,3203.97 5013.48,3213.55 2908.07,3243.34 2986.81,3243.34 3065.55,3243.34 5013.48,3253.55 5013.48,3293.55 5013.48,3333.55 2711.22,3361.45 5013.48,3373.55 5617,3394 3104.92,3400.82 5013.48,3413.55 2750.59,3440.19 5013.48,3453.55 2750.59,3479.56 2789.96,3479.56 2908.07,3479.56 3459.25,3479.56 5013.48,3493.55 3223.03,3518.93 5013.48,3533.55 2632.48,3558.3 5013.48,3573.55 5677.39,3597.21 2829.33,3597.67 2986.81,3597.67 4843.65,3698.72 4883.65,3698.72 4923.65,3698.72
  other v3: 4627.51,2201.17 4670.82,2201.17 4714.13,2201.17 4757.43,2201.17 4800.74,2201.17 4627.51,2244.47 4670.82,2244.47 4714.13,2244.47 4757.43,2244.47 3666.43,2279.17 4627.51,2287.78 4670.82,2287.78 4714.13,2287.78 4757.43,2287.78 4800.74,2287.78 3536.51,2322.47 3579.82,2322.47 3623.13,2322.47 3666.43,2322.47 3709.74,2322.47 4627.51,2331.09 4670.82,2331.09 4714.13,2331.09 4757.43,2331.09 4800.74,2331.09 3579.82,2365.78 3666.43,2365.78 3709.74,2365.78 4714.13,2374.39 4757.43,2374.39 3536.51,2409.09 3579.82,2409.09 3623.13,2409.09 3666.43,2409.09 3709.74,2409.09 3536.51,2452.39 3579.82,2452.39 3623.13,2452.39 3666.43,2452.39 3709.74,2452.39 660,3207.77 616.69,3251.08 660,3251.08 703.31,3251.08 660,3294.39 703.31,3294.39 616.69,3337.69 660,3337.69 660,3381 703.31,3381 660,3424.31 660,3467.61 703.31,3467.61 616.69,3510.92 660,3510.92 703.31,3510.92 660,3554.23 703.31,3554.23 1925.71,3613.4 1969.01,3613.4 1882.4,3656.7 1925.71,3656.7 1969.01,3656.7 2012.32,3656.7 2055.63,3656.7 1882.4,3700.01 1925.71,3700.01 1969.01,3700.01 2012.32,3700.01 2055.63,3700.01 1882.4,3743.32 1925.71,3743.32 1969.01,3743.32 2012.32,3743.32 1882.4,3786.62 1925.71,3786.62 1969.01,3786.62 2012.32,3786.62 4446.98,3917.58 4409.57,3940.22 4484.38,3940.22 4446.98,3962.86
  other v4: 4195.41,1806.64 4234.78,1806.64 4274.15,1806.64 4195.41,1846.01 4274.15,1846.01 4234.78,1885.38 4274.15,1885.38
  other v5: 3900.31,2585.27 3939.69,2585.27 3900.31,2624.64 3939.69,2624.64 3900.31,2664.01 3939.69,2664.01 4106.61,3734.72 4145.98,3734.72 4067.24,3774.09 4106.61,3774.09 4145.98,3774.09
  other v6: 3125.01,1794.1 3164.38,1794.1 3203.75,1794.1 3125.01,1833.47 3164.38,1833.47 3203.75,1833.47 3125.01,1872.84 3164.38,1872.84 3203.75,1872.84
GND_ETH: C46.2 D2.3 D2.8 R49.1 R50.1 R51.1 R52.1 | length 433.5
  Top w10: D2.3@2093.57,2417.02 D2.8@2093.57,2447.33 v3(2093.57,2492.38) ; v3(2339.57,2445.57) 2350.97,2434.18 C46.2@2427.57,2434.18
  Signal Layer 1 w10: v3(2093.57,2492.38) 2292.76,2492.38 v3(2339.57,2445.57)
GND_USB: C47.2 C119.1 C120.1 D1.4 ISO1.2 ISO1.8 J1.5 R46.1 U6.4 | length 61
  Top w4: v2(5774.13,1742.78) C47.2@5774.13,1803.78
INIT_B: R36.1 U1.AE4 | length 126.9
  Top w4: U1.AE4@3360.96,3578.85 3360.96,3577.12 3380.51,3557.58 v2(3380.51,3556.58)
  Bottom w6: R36.1@3291.98,3575.8 3316.98,3575.8 3336.2,3556.58 v2(3380.51,3556.58)
IO_BUTTON1: D8.K R105.2 S2.1 S2.2 U1.W11 | length 515.4
  Top w4: U1.W11@3085.37,3342.63 v2@3104.19,3361.45
  Top w10: S2.1@5336.37,3486.73 S2.2@5336.37,3220.99 5352.35,3205 D8.K@5437.93,3205 5443.5,3210.57 R105.2@5443.5,3317.59
  other v2: 3104.92,3361.45
IO_BUTTON2: D9.K R106.2 S3.1 S3.2 U1.AD8 | length 567
  Top w4: U1.AD8@3203.48,3539.48 v2@3222.3,3558.3
  Top w10: S3.1@5335.74,3937.87 S3.2@5335.74,3672.13 5335.74,3645.55 5382.04,3599.25 D9.K@5446.31,3599.25 5442.5,3603.07 R106.2@5442.5,3716
  other v2: 3223.03,3558.3
IO_LED1: R100.2 U1.U13 | length 26.6
  Top w4: U1.U13@3006.63,3263.89 v2@3025.45,3282.71
  other v2: 3026.18,3282.71
IO_LED2: R101.2 U1.U12 | length 26.6
  Top w4: U1.U12@3046,3263.89 v2@3064.82,3282.71
  other v2: 3065.55,3282.71
IO_LED3: R102.2 U1.Y10 | length 26.6
  Top w4: U1.Y10@3124.74,3382 v2@3143.56,3400.82
  other v2: 3144.29,3400.82
IO_LED4: R103.2 U1.AB10 | length 26.6
  Top w4: U1.AB10@3124.74,3460.74 v2@3143.56,3479.56
  other v2: 3144.29,3479.56
IO_SCLK_TEMP1: R129.1 U1.AF8 U23.4 | length 30
  Top w4: U1.AF8@3203.05,3618.52 v2@3203.05,3648.56
  other v2: 3203.35,3648.85
IO_SCLK_TEMP2: R131.1 U1.AD9 U24.4 | length 26.6
  Top w4: U1.AD9@3164.11,3539.48 v2@3182.93,3558.3
  other v2: 3183.66,3558.3
IO_TEMP1: R130.1 U1.AC9 U23.5 | length 26.6
  Top w4: U1.AC9@3164.11,3500.11 v2@3182.93,3518.93
  other v2: 3183.66,3518.93
IO_TEMP2: R132.1 U1.AA9 U24.5 | length 26.6
  Top w4: U1.AA9@3164.11,3421.37 v2@3182.93,3440.19
  other v2: 3183.66,3440.19
LED: J2.9 R48.2 U5.30 | length 1249.4
  Top w4: v1(1975.02,3226.68) 1976.53,3226.68 1983.56,3219.65 U5.30@2005.31,3219.65 ; v2(2473.13,2310.78) v2@2473.43,2310.48 ; R48.2@2503.77,2310.48 R48.2@2504.07,2310.18
  Top w7: v2@2473.43,2310.48 R48.2@2503.77,2310.48
  Bottom w7: v1(1975.02,3226.68) 2162.99,3038.7 2162.99,2513.75 J2.9@2359.57,2317.18 2364.25,2312.5 2471.4,2312.5 v2(2473.13,2310.78)
MOSI: U1.AF21 U4.5 | length 30
  Top w4: U1.AF21@2691.24,3619.38 v2@2691.24,3649.42
  other v2: 2691.54,3649.72
MOT_DIR: U1.R20 U10.3 | length 31.2
  Top w4: v2(2711.22,3162.18) 2711.22,3164.12 2731.04,3183.94 U1.R20@2731.04,3185.15
MOT_ENABLE: U1.R18 U10.26 | length 27.4
  Top w4: U1.R18@2809.78,3185.14 2828.62,3166.3 v2(2829.33,3166.3)
MOT_HOME: U1.R22 U10.2 | length 26.6
  Top w4: U1.R22@2652.3,3185.15 v2@2671.12,3203.97
  other v2: 2671.85,3203.97
MOT_RESET: U1.T22 U10.17 | length 26.6
  Top w4: U1.T22@2652.3,3224.52 v2@2671.12,3243.34
  other v2: 2671.85,3243.34
MOT_SLEEP: U1.R17 U10.27 | length 26.6
  Top w4: U1.R17@2849.15,3185.15 v2@2867.97,3203.97
  other v2: 2868.7,3203.97
MOT_SR: U1.R21 U10.16 | length 26.6
  Top w4: U1.R21@2691.67,3185.15 v2@2710.49,3203.97
  other v2: 2711.22,3203.97
MOT_STEP: U1.R19 U10.19 | length 26.6
  Top w4: U1.R19@2770.41,3185.15 v2@2789.23,3203.97
  other v2: 2789.96,3203.97
MOT_USM0: U1.P18 U10.13 | length 28.7
  Top w4: v2(2789.96,3166.3) 2789.96,3165.59 U1.P18@2809.77,3145.78
MOT_USM1: U1.P17 U10.12 | length 26.6
  Top w4: U1.P17@2849.15,3145.78 v2@2867.97,3164.6
  other v2: 2868.7,3164.6
NetC2_2: C2.2 R95.1 R96.2 U10.5 | length 236
  Top w10: C2.2@382.5,3446 394.41,3457.91 394.41,3473.91 395,3474.5 R95.1@395,3499.5 424.46,3499.5 432.46,3491.5 R96.2@433,3491.5 479.52,3444.98 U10.5@549.76,3444.98
NetC3_2: C3.2 U22.6 | length 98.2
  Top w6: C3.2@2829.41,2216.94 U22.6@2927.61,2216.94
NetC10_1: C10.1 U10.20 | length 139.1
  Top w10: U10.20@770.24,3342.61 770.43,3342.81 857.81,3342.81 v2(858,3343)
  Bottom w10: C10.1@809,3337.69 851.88,3337.69 857.19,3343 v2(858,3343)
NetC15_2: C15.2 U10.22 | length 119
  Top w10: U10.22@770.24,3393.8 770.58,3394.14 878.64,3394.14 C15.2@886,3401.5
NetC26_2: C26.2 R31.2 R32.1 U3.1
NetC51_1: C51.1 L5.2 R76.2 | length 100.2
  Top w10: R76.2@3715.31,1910.75 3736.93,1932.37 3736.93,1942.87 C51.1@3741.31,1947.25 3741.31,1973.31 3726.93,1987.69 L5.2@3720.43,1987.69
NetC51_2: C51.2 L4.2 R71.2 | length 100.7
  Top w10: R71.2@3801.31,1907.75 3780.7,1928.37 3780.7,1942.87 C51.2@3776.31,1947.25 3794.03,1964.97 3794.03,1980.41 L4.2@3801.31,1987.69
NetC52_1: C52.1 L7.2 R83.2 | length 97.3
  Top w10: L7.2@3546.51,1985.69 3540.53,1979.71 3540.53,1962.97 C52.1@3523.81,1946.25 3528.2,1941.87 3528.2,1930.87 R83.2@3550.31,1908.75
NetC52_2: C52.2 L6.2 R81.2 | length 94.2
  Top w10: R81.2@3465.51,1910.75 3484.43,1929.67 3484.43,1941.87 C52.2@3488.81,1946.25 3472.1,1962.97 3472.1,1979.11 L6.2@3465.51,1985.69
NetC53_1: C53.1 L9.2 R88.2 | length 138.5
  Top w10: C53.1@4826.63,1991.78 4827.38,1992.53 4827.38,2027.53 R88.2@4828.13,2028.28 ; C53.1@4826.73,1991.67 4826.73,1925.73 4834.05,1918.42 4834.05,1911.92 4842.63,1903.34 L9.2@4849.13,1903.34
NetC53_2: C53.2 L8.2 R87.2 | length 139.5
  Top w10: L8.2@4767.13,1903.34 4773.62,1903.34 4791.63,1921.34 C53.2@4791.63,1991.78 4790.88,1992.53 4790.88,2027.53 R87.2@4790.13,2028.28
NetC54_1: C54.1 L11.2 R74.2 | length 131.8
  Top w10: R74.2@4635.13,2027.28 4634.38,2026.53 4634.38,1990.53 C54.1@4633.63,1989.78 4651.13,1972.28 L11.2@4651.13,1903.34
NetC54_2: C54.2 L10.2 R70.2 | length 136
  Top w10: L10.2@4570.13,1902.78 4570.13,1961.28 C54.2@4598.63,1989.78 4598.38,1990.03 4598.38,2026.53 R70.2@4598.13,2026.78
NetC77_1: C77.1 U10.24 | length 175.6
  Top w10: U10.24@770.24,3444.98 832.39,3444.98 839.19,3451.77 v2(840,3451.77)
  Bottom w10: C77.1@772,3481.5 781.08,3490.58 827.07,3490.58 840,3477.65 v2(840,3451.77)
NetC77_2: C77.2 U10.23 | length 139.8
  Top w10: U10.23@770.24,3419.39 835.6,3419.39 839.19,3415.8 v2(840,3415.8)
  Bottom w10: C77.2@772,3414.5 837.89,3414.5 839.19,3415.8 v2(840,3415.8)
NetC79_2: C79.2 R98.2 U10.6 | length 149.4
  Top w10: v2(501.2,3406) 501.77,3406.57 510.87,3406.57 523.68,3419.39 U10.6@549.76,3419.39
  Bottom w10: C79.2@525.5,3453 515.39,3442.89 515.39,3421 501.2,3406.81 v2(501.2,3406) 502.01,3406 509.01,3399 R98.2@536.5,3399
NetC80_2: C80.2 R99.2 U10.9 | length 154
  Top w10: v2(495,3348) 495.81,3348 501.2,3342.61 U10.9@549.76,3342.61
  Bottom w10: C80.2@513.67,3305.76 504.43,3315.01 504.43,3337.76 495,3347.19 v2(495,3348) 495.81,3348 509.93,3362.12 R99.2@536.19,3362.12
NetC84_2: C84.2 U12.48 | length 39
  Top w10: U12.48@1821.37,3876.19 C84.2@1821.37,3915.19
NetC93_2: C93.2 U7.42 | length 107
  Top w10: C93.2@3611.31,2122.75 3613.09,2124.52 3613.09,2228.77 U7.42@3613.28,2228.97
NetC94_1: C94.1 U7.3 U7.6 | length 140.3
  Top w10: U7.3@3759.94,2296.88 v2(3788.39,2296.88) 3798.9,2296.88 3808.27,2306.25 C94.1@3808.81,2306.25 ; U7.6@3759.94,2355.94 v2(3788.39,2355.94)
  Bottom w10: v2(3788.39,2296.88) v2(3788.39,2355.94)
NetC95_1: C95.1 U7.4 U7.7 | length 133
  Top w10: U7.4@3759.94,2316.57 3760.13,2316.76 3782.34,2316.76 C95.1@3808.58,2343 3808.58,2362.16 3795.13,2375.62 U7.7@3759.94,2375.62
NetC99_1: C99.1 U8.25 | length 135.5
  Top w6: v2(4680.63,2036.78) 4723.97,2080.12 U8.25@4723.97,2111.6
  Bottom w6: v2@4680.38,2037.03 C99.1@4680.38,2079.03
  Bottom w10: C99.1@4680.13,2079.28 C99.1@4680.38,2079.03 ; v2@4680.38,2037.03 v2(4680.63,2036.78)
NetC100_1: C100.1 U8.26 | length 127.5
  Top w6: v2(4720.13,2036.78) 4743.65,2060.31 U8.26@4743.65,2111.6
  Bottom w6: v2@4719.63,2037.28 C100.1@4719.63,2078.78
  Bottom w10: C100.1@4719.13,2079.28 C100.1@4719.63,2078.78 ; v2@4719.63,2037.28 v2(4720.13,2036.78)
NetC107_2: C107.2 U21.8 | length 139.4
  Top w8: U21.8@1575.28,4315.74 1714.63,4315.74
NetC111_2: C111.2 U20.14 | length 85.4
  Top w10: U20.14@4209.19,1940.5 v2(4209.19,1985.69)
  Bottom w10: v2(4209.19,1985.69) 4209.19,1984.88 4212.7,1981.37 C111.2@4212.7,1946.92
NetC113_2: C113.2 L2.1 U12.5 U12.39 U12.42 | length 128.7
  Top w10: L2.1@1978.65,3949.19 1998.54,3929.3 v2(1998.54,3909.19) U12.39@1998.54,3876.19
  Bottom w10: v2(1998.54,3909.19) C113.2@1998.54,3956.69
NetC114_2: C114.2 L3.1 U12.34 U12.35 | length 138.2
  Top w10: U12.34@2096.97,3876.19 2097.44,3876.66 2097.44,3891.48 2097.65,3891.69 v2(2097.65,3913.19) 2097.65,3932.69 L3.1@2121.65,3956.69
  Bottom w10: v2(2097.65,3913.19) C114.2@2097.65,3960.69
NetC115_2: C115.2 U12.38 | length 106.5
  Top w10: U12.38@2018.23,3876.19 2018.23,3911.22 2035.11,3928.1 2035.11,3955.15 C115.2@2049.65,3969.69
NetC116_2: C116.2 U12.4 | length 79.6
  Top w10: U12.4@1880.43,3523.83 1880.9,3523.36 1880.9,3494.1 1881.94,3493.05 v2(1881.94,3492.24)
  Bottom w10: v2(1881.94,3492.24) 1881.94,3491.43 1887.29,3486.09 1887.29,3474.47 1903.56,3458.19 C116.2@1907.96,3458.19
NetD3_A: D3.A R100.1 | length 108.9
  Top w4: D3.A@4988.52,4252.03 D3.A@4989.52,4251.03
  Top w8: R100.1@4881,4252.03 D3.A@4988.52,4252.03
NetD4_A: D4.A R101.1 | length 110.4
  Top w4: D4.A@5165.52,4146 D4.A@5166.52,4145
  Top w8: R101.1@5056.5,4146 D4.A@5165.52,4146
NetD5_A: D5.A R102.1 | length 113
  Top w8: R102.1@5519.78,3831.5 D5.A@5519.78,3944.52
NetD6_A: D6.A R103.1 | length 114.1
  Top w4: D6.A@5622,3939.52 D6.A@5627,3944.52
  Top w8: R103.1@5622,3832.5 D6.A@5622,3939.52
NetD10_A: D10.A R107.1 | length 66
  Top w10: D10.A@1555.41,2913.81 R107.1@1555.41,2979.78
NetD11_1: D11.1 J7.1 U10.4 | length 73.2
  Top w10: v2(483,3486) 498.43,3470.57 U10.4@549.76,3470.57
  other v1: 175,2020 205,2020 235,2020 175,2140 205,2140 235,2140 160,2170 190,2170 220,2170 175,2200 205,2200 235,2200 160,2530 190,2530 220,2530 175,2560 205,2560 235,2560 160,2590 190,2590 220,2590 175,2620 205,2620 235,2620 160,2650 190,2650 220,2650 175,2680 205,2680 235,2680 160,2710 190,2710 220,2710 175,2740 205,2740 235,2740 160,2770 190,2770 220,2770 175,2800 205,2800 235,2800 160,2830 190,2830 220,2830 175,2860 205,2860 235,2860 160,2890 190,2890 220,2890 175,2920 205,2920 235,2920 160,2950 190,2950 220,2950 175,2980 205,2980 235,2980 160,3010 190,3010 220,3010 175,3040 205,3040 235,3040 160,3070 190,3070 220,3070 175,3100 205,3100 235,3100 160,3130 190,3130 220,3130 175,3160 205,3160 235,3160 160,3190 190,3190 220,3190 175,3220 205,3220 235,3220 160,3250 190,3250 220,3250 175,3280 205,3280 235,3280 160,3310 190,3310 220,3310 175,3340 205,3340 235,3340 190,3370 220,3370 250,3370 280,3370 205,3400 235,3400 265,3400 295,3400 250,3430 280,3430 265,3460 310,3490 340,3490 370,3490 460,3490
NetD12_1: D12.1 J7.2 U10.25 | length 50.6
  Top w10: U10.25@770.24,3470.57 816.49,3470.57 819.01,3473.08 v2(819.82,3473.08)
  other v1: 370,1990 430,1990 385,2020 415,2020 445,2020 355,2140 385,2140 415,2140 445,2140 310,2170 340,2170 370,2170 400,2170 325,2200 355,2200 385,2200 310,2530 340,2530 325,2560 355,2560 310,2590 340,2590 325,2620 355,2620 310,2650 340,2650 325,2680 355,2680 310,2710 340,2710 325,2740 355,2740 310,2770 340,2770 325,2800 355,2800 310,2830 340,2830 325,2860 355,2860 310,2890 340,2890 325,2920 355,2920 310,2950 340,2950 325,2980 355,2980 310,3010 340,3010 325,3040 355,3040 310,3070 340,3070 325,3100 355,3100 310,3130 340,3130 325,3160 355,3160 310,3190 340,3190 325,3220 355,3220 310,3250 340,3250 325,3280 355,3280 310,3310 340,3310 325,3340 355,3340 385,3340 370,3370 400,3370 385,3400
NetD13_1: D13.1 J7.3 U10.11 | length 75
  Top w10: v2(477,3286) 477.81,3286 483.24,3291.43 U10.11@549.76,3291.43
  other v1: 550,1990 565,2020 595,2020 625,2020 565,2140 595,2140 625,2140 550,2170 580,2170 610,2170 565,2200 595,2200 625,2200 490,2530 520,2530 505,2560 535,2560 490,2590 520,2590 505,2620 535,2620 490,2650 520,2650 505,2680 535,2680 490,2710 520,2710 505,2740 535,2740 490,2770 520,2770 505,2800 535,2800 490,2830 520,2830 505,2860 535,2860 490,2890 520,2890 505,2920 535,2920 490,2950 520,2950 505,2980 535,2980 490,3010 520,3010 505,3040 535,3040 490,3070 520,3070 505,3100 535,3100 490,3130 520,3130 505,3160 490,3190 520,3190 505,3220 490,3250
NetD14_1: D14.1 J7.4 U10.18 | length 50.8
  Top w10: U10.18@770.24,3291.43 816.05,3291.43 819.01,3294.39 v2(819.82,3294.39)
  other v1: 760,1990 820,1990 775,2020 805,2020 835,2020 775,2140 805,2140 835,2140 760,2170 790,2170 820,2170 775,2200 805,2200 835,2200 715,2620 700,2650 730,2650 715,2680 700,2710 730,2710 715,2740 700,2770 730,2770 715,2800 700,2830 730,2830 715,2860 700,2890 730,2890 715,2920 700,2950 730,2950 715,2980 700,3010 730,3010 715,3040 700,3070 730,3070 715,3100 835,3280
NetD15_1: D15.1 F1.1 J8.1 J8.2 J8.3
  other v1: 1120,2260 1120,2260 1240,2260 1240,2260 1270,2260 1270,2260 1420,2260 1420,2260 1255,2290 1255,2290 1435,2290 1435,2290 1585,2290 1585,2290 1270,2320 1270,2320 1420,2320 1420,2320 1255,2350 1255,2350 1285,2350 1285,2350 1435,2350 1435,2350 1585,2350 1585,2350 1135,2410 1135,2410 1165,2410 1165,2410 1195,2410 1195,2410 1225,2410 1225,2410 1255,2410 1255,2410 1285,2410 1285,2410 1315,2410 1315,2410 1345,2410 1345,2410 1375,2410 1375,2410 1405,2410 1405,2410 1435,2410 1435,2410 1465,2410 1465,2410 1495,2410 1495,2410 1525,2410 1525,2410 1555,2410 1555,2410 1585,2410 1585,2410 1120,2440 1120,2440 1150,2440 1150,2440 1180,2440 1180,2440 1210,2440 1210,2440 1240,2440 1240,2440 1270,2440 1270,2440 1300,2440 1300,2440 1330,2440 1330,2440 1360,2440 1360,2440 1390,2440 1390,2440 1420,2440 1420,2440 1450,2440 1450,2440 1480,2440 1480,2440 1510,2440 1510,2440 1540,2440 1540,2440 1570,2440 1570,2440 1270,2620 1270,2620 1300,2620 1300,2620 1330,2620 1330,2620 1360,2620 1360,2620 1390,2620 1390,2620 1420,2620 1420,2620 1450,2620 1450,2620 1480,2620 1480,2620 1510,2620 1510,2620 1540,2620 1540,2620 1570,2620 1570,2620 1225,2650 1225,2650 1255,2650 1255,2650 1285,2650 1285,2650 1315,2650 1315,2650 1345,2650 1345,2650 1375,2650 1375,2650 1405,2650 1405,2650 1435,2650 1435,2650 1465,2650 1465,2650 1495,2650 1495,2650 1525,2650 1525,2650 1555,2650 1555,2650 1210,2680 1210,2680 1240,2680 1240,2680 1450,2680 1450,2680 1480,2680 1480,2680 1510,2680 1510,2680 1540,2680 1540,2680 1195,2710 1195,2710 1225,2710 1225,2710 1255,2710 1255,2710 1465,2710 1465,2710 1495,2710 1495,2710 1240,2740 1240,2740 1450,2740 1450,2740 1480,2740 1480,2740 1255,2770 1255,2770
NetD16_1: D16.1 J5.1 R75.1 | length 431.6
  Top w10: J5.1@3773.31,1347.25 3771.63,1348.94 3771.63,1565.56 R75.1@3769.94,1567.25 3973.97,1567.25 D16.1@3978.31,1562.91
NetD17_1: D17.1 J6.1 R82.1 | length 469.9
  Top w10: D17.1@3253.31,1606.8 3258.36,1601.75 R82.1@3466.31,1601.75 3465.92,1601.35 3465.92,1347.65 J6.1@3465.51,1347.25
NetD18_1: D18.1 J3.1 R62.2 R63.2 | length 439.9
  Top w10: R62.2@4820.21,1530.28 R63.2@4857.63,1530.28 4897.19,1490.72 4921.64,1490.72 D18.1@4949.13,1463.24 5014.87,1463.24 5114.32,1363.78 J3.1@5191.13,1363.78
NetD19_1: D19.1 J4.1 R69.2 R73.2 | length 437.7
  Top w10: J4.1@4292.13,1363.78 4458.7,1363.78 4535.16,1440.24 D19.1@4537.13,1440.24 4556.74,1459.85 4556.74,1550.89 4556.88,1551.03 4597.13,1551.03 R73.2@4598.38,1549.78
NetISO1_6: ISO1.6 R44.1 | length 83.6
  Top w4: R44.1@5577.13,1601.78 5577.13,1682.53 ISO1.6@5579.13,1684.53
NetISO1_7: ISO1.7 R42.1 | length 82.3
  Top w4: R42.1@5629.13,1602.28 ISO1.7@5629.13,1684.53
NetISO1_10: ISO1.10 R45.1 | length 83.2
  Top w10: ISO1.10@5629.13,2041.03 5630.78,2042.68 5630.78,2096.93 R45.1@5649.63,2115.78
NetISO1_11: ISO1.11 R43.1 | length 79.5
  Top w10: R43.1@5567.63,2115.78 5567.63,2115.24 5579.13,2103.74 ISO1.11@5579.13,2041.03
NetJ1_6: J1.6 J1.7 J1.8 J1.9 J1.10 J1.11 R46.2 | length 520.8
  Top w7: J1.10@5484.51,1297.48 J1.9@5582.94,1297.48 J1.8@5661.68,1297.48 J1.7@5760.1,1297.48
  Bottom w10: J1.10@5484.51,1297.48 5484.51,1309.29 5523.88,1348.66 J1.11@5523.88,1403.78 ; J1.6@5720.73,1403.78 5720.73,1348.66 5760.1,1309.29 J1.7@5760.1,1297.48
NetJ2_10: J2.10 R47.1 | length 75.2
  Top w4: J2.10@2269.57,2317.18 J2.10@2269.82,2317.43 ; R47.1@2269.82,2391.93 R47.1@2270.07,2392.18
  Top w7: J2.10@2269.82,2317.43 R47.1@2269.82,2391.93
NetL4_1: L4.1 R78.2 U7.47 | length 223.7
  Top w10: U7.47@3711.71,2228.97 3711.71,2183.1 3749.71,2145.1 3750.47,2145.1 3783.81,2111.75 R78.2@3783.81,2086.75 3801.31,2069.25 L4.1@3801.31,2042.81
NetL5_1: L5.1 R77.2 U7.46 | length 212.4
  Top w10: U7.46@3692.02,2228.97 3692.02,2177.09 3737.93,2131.18 R77.2@3737.93,2086.75 3720.43,2069.25 L5.1@3720.43,2042.81
NetL6_1: L6.1 R85.2 U7.38 | length 220.6
  Top w10: L6.1@3465.51,2040.81 3472.01,2040.81 3483.01,2051.82 R85.2@3483.01,2084.75 3483.01,2125.52 3534.54,2177.05 U7.38@3534.54,2228.97
NetL7_1: L7.1 R84.2 U7.39 | length 209.7
  Top w10: L7.1@3546.51,2040.81 3540.02,2040.81 3529.01,2051.82 R84.2@3529.01,2084.75 3529.01,2140.97 3554.23,2166.18 U7.39@3554.23,2228.97
NetL8_1: L8.1 U9.13 | length 113.6
  Top w10: L8.1@4767.13,1848.22 4769.34,1846.01 U9.13@4769.34,1735.49
NetL9_1: L9.1 U9.12 | length 168
  Top w10: U9.12@4800.83,1703.99 4800.83,1806.43 4842.63,1848.22 L9.1@4849.13,1848.22
NetL10_1: L10.1 U9.19 | length 176.2
  Top w10: L10.1@4570.13,1847.66 4576.62,1847.66 4639.42,1784.87 U9.19@4639.42,1703.99
NetL11_1: L11.1 U9.18 | length 124.7
  Top w10: L11.1@4651.13,1848.22 4657.62,1848.22 4670.91,1834.93 U9.18@4670.91,1735.49
NetM1_10: M1.10 U1.E21 | length 26.6
  Top w4: U1.E21@2691.67,2791.45 v2@2710.49,2810.27
  other v2: 2711.22,2810.27
NetM1_11: M1.11 U1.A24 | length 27.8
  Top w4: v2@2572.83,2606.13 U1.A24@2572.83,2633.97
  other v2: 2573.13,2605.84
NetM1_12: M1.12 U1.F20 | length 26.6
  Top w4: U1.F20@2731.04,2830.82 v2@2749.86,2849.64
  other v2: 2750.59,2849.64
NetM1_13: M1.13 U1.C23 | length 26.6
  Top w4: U1.C23@2612.93,2712.71 v2@2631.75,2731.53
  other v2: 2632.48,2731.53
NetM1_18: M1.18 R40.1 R41.2 | length 790.7
  Top w4: R40.1@5150.63,2052.78 R40.1@5152.13,2054.28 ; M1.18@5838.13,2204.76 M1.18@5844.35,2198.54
  Top w10: R40.1@5152.13,2054.28 R41.2@5152.13,2089.28 ; R41.2@5153.63,2090.78 5202.63,2139.78 v2(5234.13,2139.78) ; v2(5769.13,2143.78) 5769.94,2143.78 5774.58,2148.42 5804.07,2148.42 5838.13,2182.47 M1.18@5838.13,2204.76
  Bottom w10: v2(5234.13,2139.78) 5764.31,2139.78 5768.31,2143.78 v2(5769.13,2143.78)
NetR26_1: R26.1 R27.2 | length 39.8
  Bottom w7: R27.2@4367.55,3327.82 4367.79,3328.06 4367.79,3367.2 R26.1@4368.03,3367.44
NetR28_1: R28.1 U2.L8 | length 67
  Top w4: v2(4458.95,3319.73) 4458.95,3319.54 4472.68,3305.82 U2.L8@4472.68,3305.62
  Bottom w6.24: v2(4458.95,3319.73) 4460.04,3319.73 4491.89,3351.59 R28.1@4492.98,3351.59
NetR33_2: R33.2 U4.2 | length 78.9
  Top w6: U4.2@4565.72,2789.01 v2(4605.86,2789.01)
  Bottom w6: R33.2@4567.98,2791.02 4568.98,2790.01 4604.85,2790.01 v2(4605.86,2789.01)
NetR54_1: R54.1 U12.22 | length 145.2
  Top w10: U12.22@2145.19,3650.8 2181.92,3649.89 2190.99,3640.82 ccw(c2289.57,3654.91) 2195.46,3622.34 2218.65,3555.33 R54.1@2222.65,3551.33
NetR55_1: R55.1 R56.2 U21.4 | length 472.7
  Top w8: U21.4@1575.28,4115.74 1634.33,4115.74 1687.13,4062.94 1687.13,3777.41 1677.07,3767.35 R55.1@1677.07,3766.72 R56.2@1715.63,3766.72
NetR59_1: R59.1 R60.2 | length 39.5
  Bottom w4: R59.1@4679.63,2154.78 R60.2@4719.13,2154.78
NetR61_1: R61.1 U9.5 | length 93.6
  Top w10: R61.1@4726.15,1490.72 4726.69,1490.72 4736.85,1500.88 4737.22,1500.88 4749.65,1513.31 U9.5@4749.65,1574.07
NetR61_2: R61.2 R62.1 U9.6 | length 97.3
  Top w10: R61.2@4761.15,1490.72 4780.83,1510.39 4780.83,1525.9 R62.1@4785.21,1530.28 4769.34,1546.15 ; 4768.5,1549.13 4768.5,1573.24 U9.6@4769.34,1574.07
NetR64_1: R64.1 R75.2 U11.1 | length 113.9
  Top w10: U11.1@3704.98,1659.37 3730.98,1659.37 3733.64,1656.71 3733.64,1653.17 3744.94,1641.87 R64.1@3769.94,1641.87 R75.2@3769.94,1602.25
NetR64_2: R64.2 R71.1 U11.2 | length 277.2
  Top w10: U11.2@3704.98,1684.96 3734.09,1684.96 3742.18,1676.87 R64.2@3769.94,1676.87 3801.31,1708.24 R71.1@3801.31,1872.75
NetR65_1: R65.1 U7.43 | length 114.6
  Top w10: U7.43@3632.97,2228.97 3632.97,2182.75 3653.31,2162.4 R65.1@3653.31,2122.75
NetR66_2: R66.2 R67.2 U9.7 | length 123.8
  Top w10: U9.7@4800.83,1605.57 4810.52,1605.57 4828.31,1587.78 R66.2@4879.63,1587.78 4879.44,1587.96 4879.44,1625.07 R67.2@4879.26,1625.25
NetR67_1: R67.1 U9.8 | length 43.4
  Top w10: U9.8@4800.83,1625.25 R67.1@4844.26,1625.25
NetR68_1: R68.1 U9.23 | length 42.2
  Top w10: R68.1@4598.13,1623.07 4599.25,1624.19 4638.35,1624.19 U9.23@4639.42,1625.25
NetR68_2: R68.2 R69.1 U9.24 | length 88.9
  Top w10: R69.1@4558.13,1587.28 4558.52,1587.67 4597.73,1587.67 R68.2@4598.13,1588.07 4615.63,1605.57 U9.24@4639.42,1605.57